# Altium PCB SGK_DVR_01.PcbDoc (part 4 of 7)
Units mil, origin at the board's own origin, x right, y up, seen from the top; angles counter-clockwise.
Board outline 3070.87 x 2598.47 mil, 6 copper layers (Top, L2 GND, l3 POWER, L4 SIG, L5 GND, Bottom), stack 58.1 mil thick; 475 components, 339 nets, 1964 pads, 1036 vias.
Unrouted connection lines stored in the file: 522.
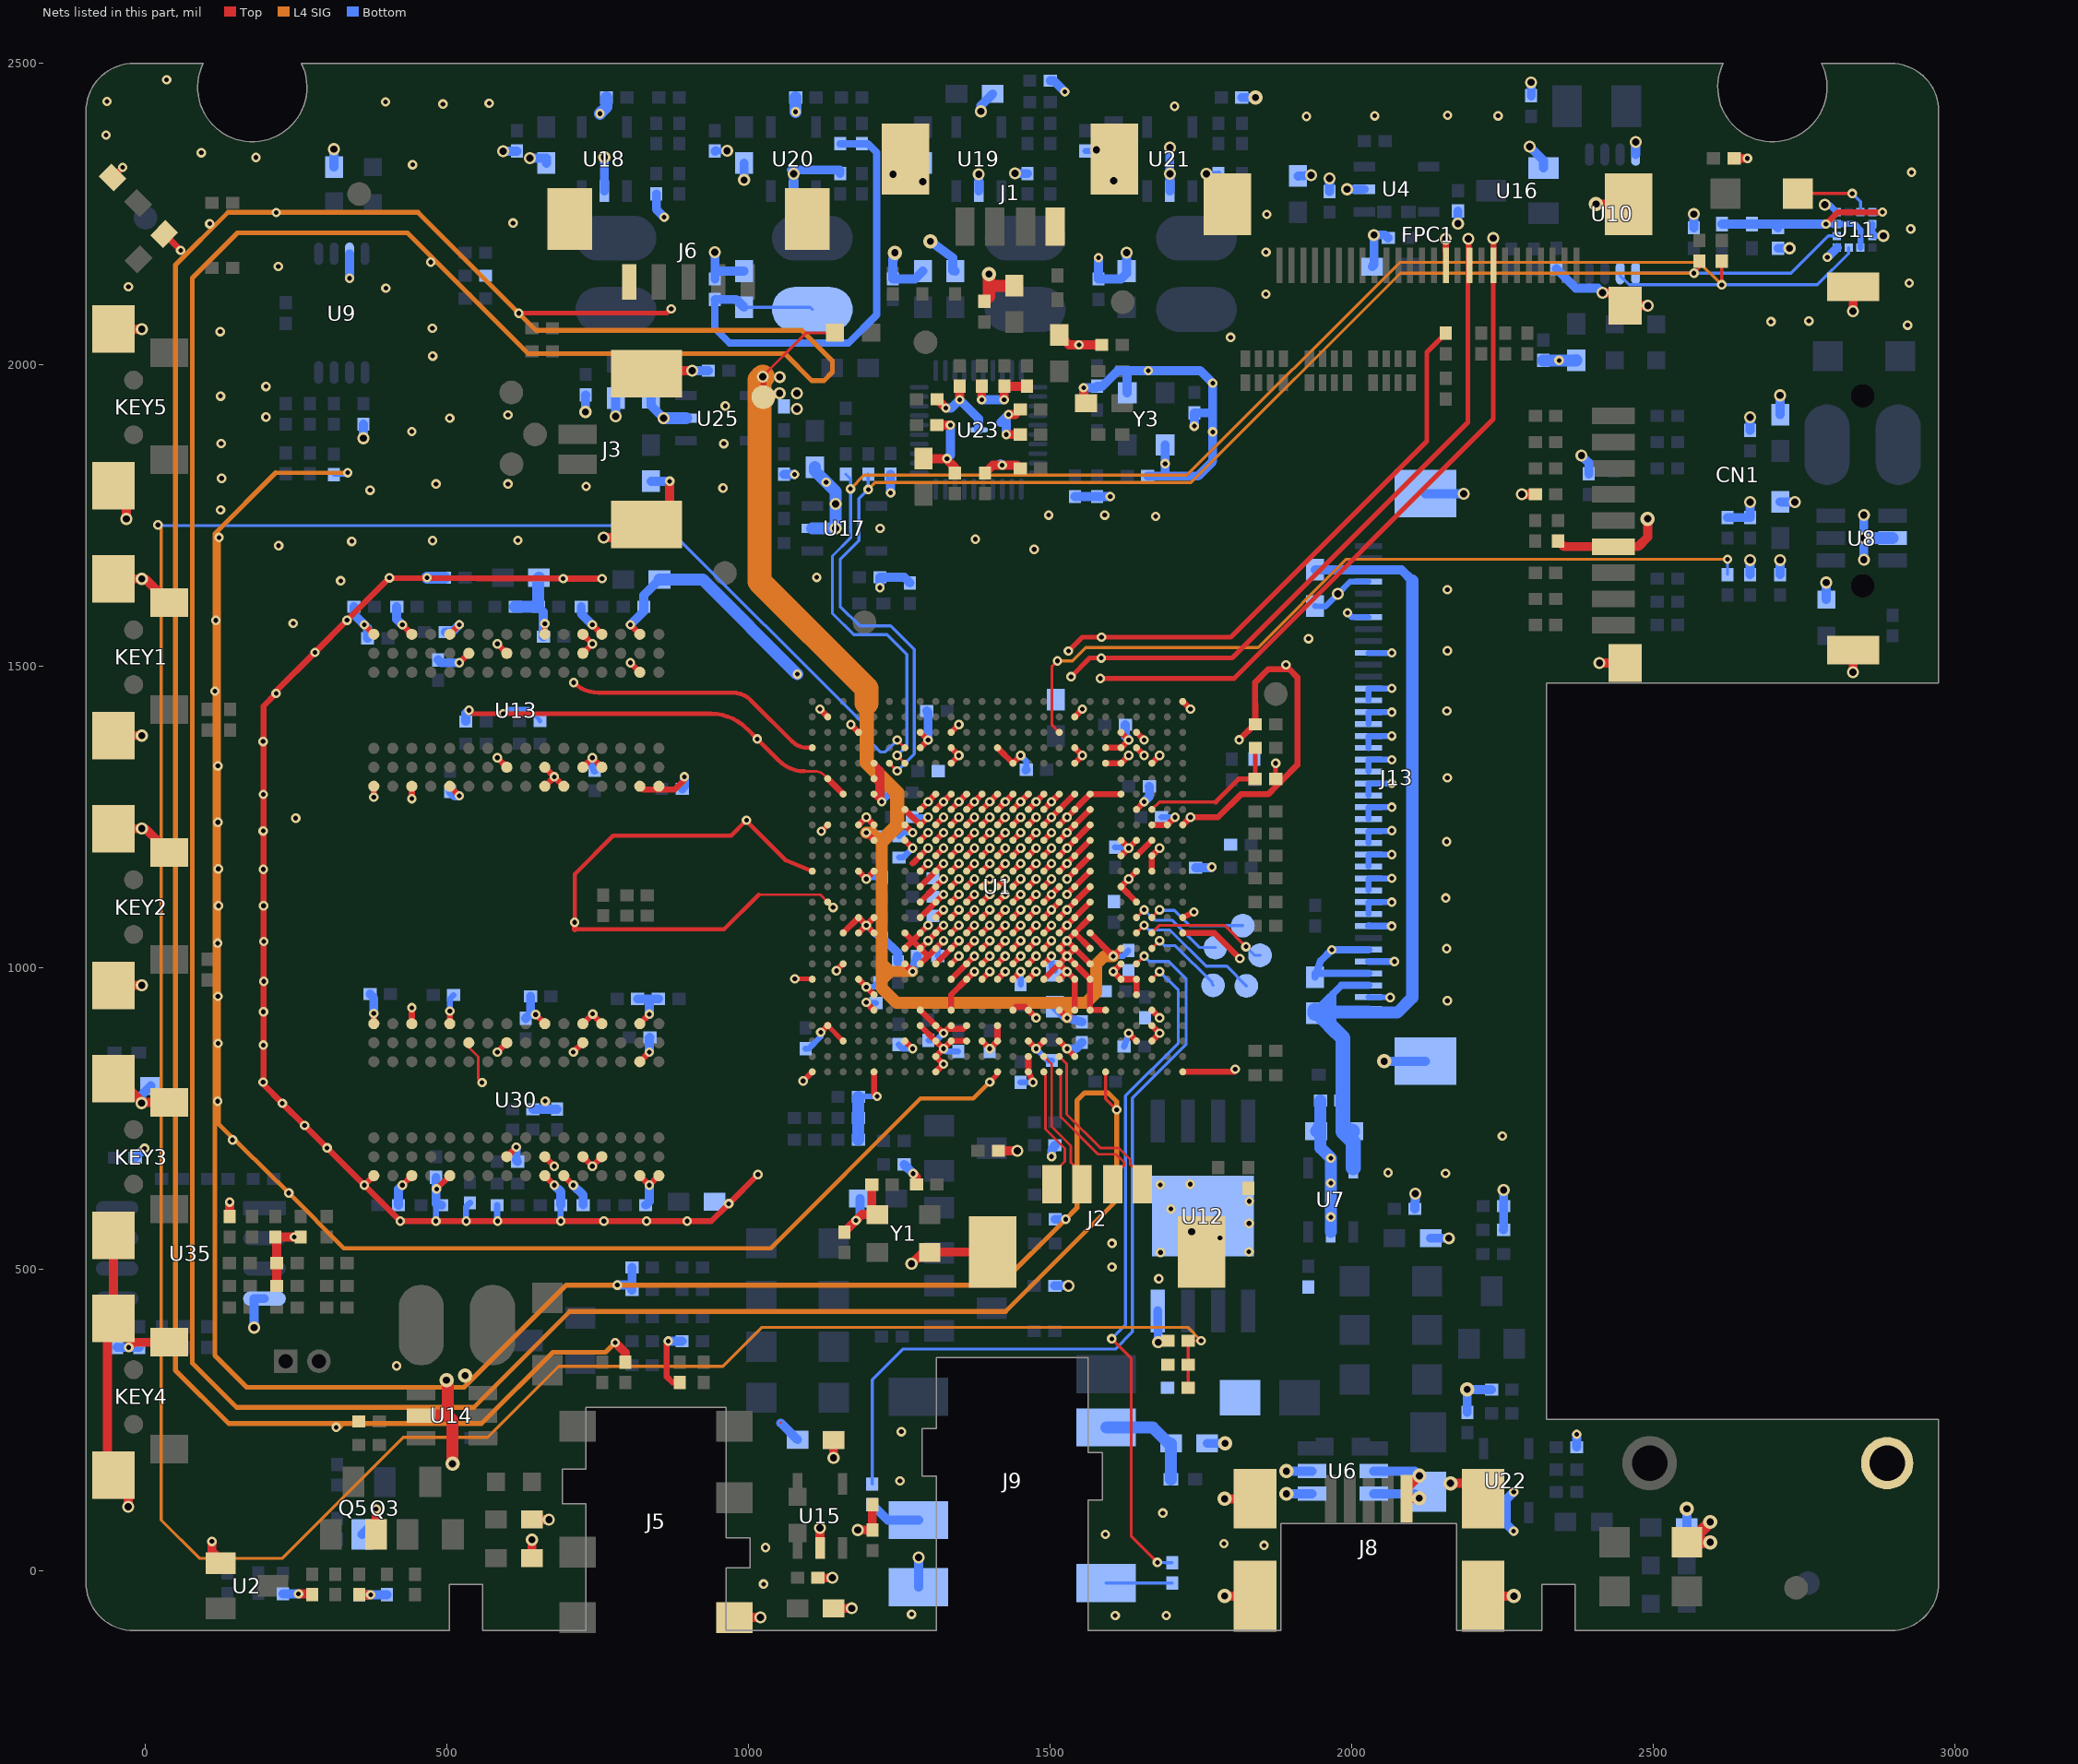
[diagram p6: the nets of this part, all layers, seen from the top]

## Via types
v1: diameter 15.75, hole 7.87, Top to Bottom, 800 vias
v2: diameter 20, hole 12, Top to Bottom, 204 vias
v3: diameter 23.62, hole 11.81, Top to Bottom, 31 vias
v4: diameter 14, hole 8, Top to Bottom, 1 vias

## Nets (pads, with @x,y where several pads share a name; then routed paths per layer and width w, separated by ;. In a path a pad name is that pad's centre, name@x,y a point inside that pad or via, vN(x,y) a via of type N, cw(c..) or ccw(c..) an arc to the next point about the centre after c; other vN are vias at no path point) (continued)
DSI_3_3V: C68.2 C70.2 C204.2 C205.2 FB7.2 J13.3 J13.38 J13.40 U7.5 | length 1659.1
  Bottom w5: C70.2@1981.83,780.09 1983.34,780.09 C70.2@1984.89,778.53
  Bottom w12: C205.2@1938.79,925.05 1938.9,925.09 1938.98,925.12 1939.87,925.44 1942.35,926.31 1953.05,930.1 1957.63,931.72 1958.66,932.08 1959.21,932.08 ; C205.2@1938.9,927.83 1939.87,928.8 1962.16,951.08 ; C205.2@1953.05,915.61 1959.21,921.77 ; 1957.63,911.04 1959.21,912.62 ; 1966.67,902 1968.42,903.76 1968.42,926.37 1968.42,930.98 ; J13.40@2027.56,932.08 1969.52,932.08 ; J13.38@2027.56,971.45 1982.33,971.45 1982.33,971.25 1968.42,957.35 ; 1959.21,912.62 1962.16,915.56 1962.16,924.72 ; 1959.21,912.62 1959.21,921.77 ; 1959.21,921.77 1962.16,924.72 ; 1959.21,921.77 1959.21,932.08 ; 1959.21,932.08 1962.16,932.08 ; 1962.16,924.72 1963.81,926.37 1968.42,930.98 ; 1962.16,924.72 1962.16,932.08 ; 1962.16,932.08 1962.16,951.08 ; 1962.16,932.08 1968.42,932.08 ; 1962.16,951.08 1968.42,957.35 ; 1968.42,930.98 1969.52,932.08 ; 1968.42,930.98 1968.42,932.08 ; 1968.42,932.08 1969.52,932.08 ; 1968.42,932.08 1968.42,957.35
  Bottom w15: C204.2@1938.98,1660.43 J13.3@2027.56,1660.43 2081.91,1660.43 2100,1642.34
  Bottom w20: 1963.81,926.37 1968.42,926.37 2075.41,926.37 2100,950.96 2100,1642.34
  Bottom w25: C205.2@1938.79,925.05 1938.9,927.83 1938.98,929.69 1939.87,928.8 1942.35,926.31 1953.05,915.61 1957.63,911.04 1966.67,902 1984.89,883.78 FB7.2@1984.89,823.25 1984.89,778.53 C68.2@1984.89,739.59 ; C68.2@2000.66,729.51 1994.89,729.59 C68.2@1984.89,739.59 ; U7.5@2002.29,668.85 2002.29,711.36 1984.89,728.76 C68.2@1984.89,739.59
DVDD_DDR: C28.2 C29.2 C32.2 C33.2 C34.2 C166.1 C167.1 C168.1 FB13.2 L11.2 R146.1 R186.1 TP3.1 U1.AA10 U1.E17 U1.G16 U1.J21 U1.W18 | length 3052.3
  Top w4.4: v2(1023.23,1980.49) 1023.23,1981.2 1095.48,2053.45 R146.1@1142.96,2053.45
  Top w10: v2(1023.23,1980.49) 1024.27,1979.46 TP3.1@1024.27,1946.67 ; v1(1194.91,1224.58) U1.AA10@1207.71,1211.78 ; U1.W18@1258.89,1007.06 v1(1271.68,994.26) ; U1.J21@1514.79,930.29 v1(1527.58,917.49) ; U1.G16@1565.97,1058.24 v1(1604.35,1019.85) U1.E17@1617.15,1032.65
  L4 SIG w18: 1220.74,979.81 1235.19,994.26 ; 1220.74,994.26 1235.19,994.26 ; 1220.74,1008.71 1235.19,994.26 ; v1(1271.68,994.26) 1235.19,994.26 ; 1514.88,942.6 1526.32,931.17 1527.58,931.17 ; v1(1527.58,917.49) 1527.58,930.42 ; 1527.58,942.6 1527.58,931.17 ; 1539.76,942.6 1527.58,930.42 ; 1527.58,930.42 1527.58,931.17
  L4 SIG w20: v1(1194.91,1224.58) 1204.29,1224.58 1220.74,1208.12 ; 1220.74,1210.75 1220.74,1208.12 ; v1(1604.35,1019.85) 1589.81,1019.85 1575.89,1005.93 1575.89,959.11 1559.39,942.6 1539.76,942.6 1527.58,942.6 1514.88,942.6 1244.81,942.6 1220.74,966.67 1220.74,979.81 1220.74,994.26 1220.74,1008.71 1220.74,1208.12
  L4 SIG w24: 1195.56,1439.16 1195.56,1340.72 1246.05,1290.23 1246.05,1236.06 1220.74,1210.75
  L4 SIG w40: v2(1023.23,1980.49) 1017.82,1975.08 1017.82,1641.19 1195.56,1463.45 1195.56,1439.16
  Bottom w5: C168.1@992.35,2095.66 1083.94,2095.66 1102.02,2095.66 L11.2@1105.5,2092.18
  Bottom w10: v1(1194.91,1224.58) 1200.95,1218.53 C28.2@1215.33,1218.53 ; v1(1604.35,1019.85) 1620.55,1019.85 1629.41,1028.72 C34.2@1629.41,1029.34
  Bottom w12: C167.1@944.06,2108.6 944.06,2060.58 968.49,2036.15 1087.59,2036.15 1165.09,2036.15 1212.04,2083.11 1212.04,2352.34 1197.64,2366.74 R186.1@1187.72,2366.74 C166.1@1151.42,2366.74
  Bottom w15: C167.1@944.06,2108.6 979.41,2108.6 C168.1@992.35,2095.66 ; v1(1271.68,994.26) 1271.42,994.51 C29.2@1279.51,1020.05 ; C32.2@1507.4,935.8 1525.72,917.49 v1(1527.58,917.49) C33.2@1552.55,910.73
  other v2: 1079.98,1927 1051.24,1953.2 1079.98,1953.1 1051.29,1980.1
E_RXN: J2.1 U1.K25 | length 209.5
  Top w4.2: U1.K25@1489.2,827.92 1491.85,825.27 1491.85,733.14 1523.94,701.05 1523.94,679.7 1502.83,658.6 J2.1@1502.83,641.56
E_RXP: J2.2 U1.K24 | length 238
  Top w4.2: U1.K24@1489.2,853.51 1502.05,840.66 1502.05,737.36 1534.14,705.27 1534.14,677.72 1552.05,659.82 J2.2@1552.05,641.56
E_TXN: J2.4 U1.J24 | length 286.6
  Top w4.2: U1.J24@1514.79,853.51 1527.18,841.12 1527.18,757.65 1583.22,701.61 1613.36,701.61 1632.59,682.38 1632.59,674.52 1652.44,654.66 J2.4@1652.44,641.56
E_TXP: J2.3 U1.J25 | length 256.5
  Top w4.2: U1.J25@1514.79,827.92 1516.98,825.73 1516.98,753.42 1579,691.4 1609.13,691.4 1622.38,678.16 1622.38,673.01 1603.23,653.85 J2.3@1603.23,641.56
G_SEN_SCK: R8.1 R33.2 U1.W5 U10.6 U11.12 | length 2665.1
  Top w4.2: v1(1246.09,1352.53) U1.W5@1258.89,1339.73
  Top w5: v1(2612.86,2132.89) 2612.86,2166.81 2612.98,2166.92 R8.1@2612.98,2172.29
  L4 SIG w5: v1(1168.75,1794.56) 1191.35,1817.17 1726.37,1817.17 2079.33,2170.13 2575.63,2170.13 v1(2612.86,2132.89)
  Bottom w5: R33.2@1160.91,1818.72 1168.75,1810.89 v1(1168.75,1794.56) 1168.75,1713.25 1138.74,1683.24 1138.74,1588.11 1173.94,1552.91 1229.24,1552.91 1262.3,1519.86 1262.3,1368.74 v1(1246.09,1352.53) ; U10.6@2444.6,2152.14 2444.7,2152.04 2444.7,2147.91 2459.72,2132.89 2574.27,2132.89 v1(2612.86,2132.89) 2771.51,2132.89 2823.29,2184.67 U11.12@2823.29,2194.38
G_SEN_SDA: R9.1 R34.2 U1.Y5 U10.5 U11.2 | length 2522.1
  Top w5: U1.Y5@1233.3,1339.73 v1(1246.09,1326.94) ; v1(2566.95,2152.14) 2575.9,2161.09 2575.9,2172.08 R9.1@2575.7,2172.29
  L4 SIG w5: v1(1198.12,1793.52) 1209.56,1804.96 1733.34,1804.96 2080.51,2152.14 v1(2566.95,2152.14)
  Bottom w5: R34.2@1198.12,1818.72 v1(1198.12,1793.52) 1182.78,1778.18 1182.78,1708.89 1151.64,1677.75 1151.64,1599.65 1183.96,1567.33 1235.23,1567.33 1274.33,1528.24 1274.33,1355.18 v1(1246.09,1326.94) ; U10.5@2470.19,2152.14 v1(2566.95,2152.14) 2727.95,2152.14 2789.88,2214.07 U11.2@2803.6,2214.07
GENSOR_V33: C120.1 FB10.2 FB11.2 U11.3 U11.7 U11.11 | length 404
  Top w10: v1(2785.68,2233.49) 2805.63,2253.44 v1(2879.39,2253.44)
  Bottom w10: v1(2785.68,2233.49) 2803.6,2233.49 2816.4,2233.49 2816.67,2233.75 ; U11.3@2803.6,2233.75 2816.67,2233.75 ; U11.11@2842.97,2194.38 2842.97,2224.22 2833.45,2233.75 2816.67,2233.75 ; U11.7@2862.66,2253.44 v1(2879.39,2253.44)
  Bottom w15: FB11.2@2613.12,2233.49 FB10.2@2662.98,2233.49 C120.1@2700.19,2233.49 ; C120.1@2706.19,2227.49 C120.1@2700.19,2233.49 ; v1(2785.68,2233.49) 2706.19,2233.49 C120.1@2700.19,2233.49
GND: C1.1 C2.1 C3.1 C4.1 C5.1 C6.1 C7.1 C8.1 C9.1 C10.1 C11.1 C12.1 C13.1 C14.1 C15.1 C16.1 C17.1 C18.1 C19.1 C20.1 C21.1 C22.1 C23.1 C24.1 C25.1 C26.1 C27.1 C28.1 C29.1 C30.1 C31.1 C32.1 C33.1 C34.1 C35.2 C36.2 C39.2 C41.2 C42.2 C43.1 C44.1 C45.1 C46.1 C47.1 C48.1 C49.2 C50.1 C51.2 C53.1 C54.1 C56.1 C57.1 C58.1 C60.2 C61.1 C62.1 C63.1 C64.1 C65.1 C66.1 C67.2 C68.1 C69.2 C70.1 C71.1 C72.1 C73.1 C74.2 C76.1 C77.1 C78.1 C79.1 C80.1 C81.1 C82.1 C88.1 C89.1 C90.1 C91.1 C93.1 C94.1 C95.1 C96.1 C97.2 C98.1 C99.2 C100.1 C101.2 C107.1 C108.1 C109.1 C110.1 C111.1 C114.1 C115.2 C116.1 C117.2 C118.1 C119.1 C120.2 C121.2 C122.1 C123.1 C124.1 C125.1 C126.1 C129.2 C130.1 C132.1 C133.1 C134.1 C136.1 C137.1 C138.1 C139.1 C141.1 C142.1 C143.1 C144.1 C145.1 C146.1 C147.1 C148.1 C149.1 C150.1 C151.1 C152.1 C153.1 C156.2 C157.2 C158.2 C159.2 C160.1 C162.2 C163.2 C164.2 C165.2 C167.2 C168.2 C170.2 C171.2 C172.2 C173.2 C174.2 C175.2 C176.1 C177.1 C178.1 C179.1 C180.1 C181.1 C182.1 C183.1 C184.1 C185.1 C186.1 C194.2 C195.2 C196.1 C197.1 C198.1 C199.1 C200.1 C201.1 C202.1 C204.1 C205.1 C271.1 C272.1 C273.1 C274.1 C275.1 C276.1 C278.1 C282.1 C284.1 C285.1 CN1.6 CN1.10 CN1.11 CN1.12 CN1.13 D9.1 FPC1.8 FPC1.10 FPC1.12 FPC1.27 FPC1.28 J1.1 J1.5 J1.6 J2.5 J2.6 J3.3 J3.4 J5.1 J6.5 J6.6 J6.7 J7.2 J8.5 J8.6 J8.7 J8.8 J8.9 J9.1 J13.4 J13.7 J13.10 J13.13 J13.14 J13.15 J13.16 J13.17 J13.18 J13.19 J13.20 J13.21 J13.22 J13.23 J13.24 J13.25 J13.26 J13.27 J13.28 J13.29 J13.30 J13.31 J13.32 J13.33 J13.35 J13.36 J13.37 J13.39 J13.41 J13.42 KEY1.2 KEY1.3 KEY1.4 KEY2.2 KEY2.3 KEY2.4 KEY3.2 KEY3.3 KEY3.4 KEY4.2 KEY4.3 KEY4.4 KEY5.3 KEY5.4 LED1.2 LED3.2 Q3.2 Q5.2 R1.2 R2.2 R5.2 R12.1 R29.2 R45.1 R47.1 R52.2 R54.1 R55.1 R58.1 R59.1 R62.1 R63.2 R84.1 R88.1 R92.1 R93.2 R94.2 R96.2 R98.2 R99.2 R102.2 R112.1 R114.2 R115.1 R118.1 R121.1 R133.2 R143.2 R144.2 R145.2 R148.2 R150.2 R154.1 R156.1 R165.2 R166.2 R173.2 R174.2 R177.2 R185.1 R191.2 R195.2 R196.1 R199.1 R288.1 U1.A1 U1.A9 U1.A15 U1.A16 U1.A25 U1.AA5 U1.AA6 U1.AA7 U1.AA9 U1.AA12 U1.AA15 U1.AA16 U1.AA20 U1.AA21 U1.AA25 U1.AB3 U1.AB9 U1.AB12 U1.AB15 U1.AB16 U1.AB19 U1.AC7 U1.AC16 U1.AC18 U1.AC23 U1.AD2 U1.AD6 U1.AD9 U1.AD14 U1.AD22 U1.AE4 U1.AE12 U1.AE19 U1.AE25 U1.B9 U1.C5 U1.C9 U1.C10 U1.C11 U1.C12 U1.C21 U1.C22 U1.C23 U1.D3 U1.D4 U1.D8 U1.D10 U1.D11 U1.D12 U1.D14 U1.D19 U1.D20 U1.D23 U1.E3 U1.E4 U1.E5 U1.E7 U1.E10 U1.E11 U1.E13 U1.E18 U1.E19 U1.F4 U1.F5 U1.F21 U1.F25 U1.G7 U1.G8 U1.G9 U1.G10 U1.G11 U1.G12 U1.G13 U1.G14 U1.G15 U1.G17 U1.G18 U1.G19 U1.G21 U1.H2 U1.H4 U1.H5 U1.H7 U1.H8 U1.H9 U1.H10 U1.H11 U1.H12 U1.H13 U1.H14 U1.H15 U1.H16 U1.H17 U1.H18 U1.H19 U1.H21 U1.H24 U1.J7 U1.J8 U1.J9 U1.J10 U1.J11 U1.J12 U1.J13 U1.J14 U1.J15 U1.J16 U1.J17 U1.J18 U1.J19 U1.J23 U1.K7 U1.K8 U1.K9 U1.K10 U1.K11 U1.K12 U1.K13 U1.K14 U1.K15 U1.K16 U1.K17 U1.K18 U1.K19 U1.K23 U1.L7 U1.L8 U1.L9 U1.L10 U1.L11 U1.L12 U1.L13 U1.L14 U1.L15 U1.L16 U1.L17 U1.L18 U1.L19 U1.L21 U1.L23 U1.L24 U1.L25 U1.M5 U1.M7 U1.M8 U1.M9 U1.M10 U1.M11 U1.M12 U1.M13 U1.M14 U1.M15 U1.M16 U1.M17 U1.M18 U1.M19 U1.M21 U1.N4 U1.N7 U1.N8 U1.N9 U1.N10 U1.N11 U1.N12 U1.N13 U1.N14 U1.N15 U1.N16 U1.N17 U1.N18 U1.N19 U1.N22 U1.N23 U1.N25 U1.P7 U1.P8 U1.P9 U1.P10 U1.P11 U1.P12 U1.P13 U1.P14 U1.P15 U1.P16 U1.P17 U1.P18 U1.P19 U1.P23 U1.R7 U1.R8 U1.R9 U1.R10 U1.R11 U1.R12 U1.R13 U1.R14 U1.R15 U1.R16 U1.R17 U1.R18 U1.R19 U1.R22 U1.R23 U1.T3 U1.T4 U1.T5 U1.T7 U1.T8 U1.T9 U1.T10 U1.T11 U1.T12 U1.T13 U1.T14 U1.T15 U1.T16 U1.T17 U1.T18 U1.T19 U1.T21 U1.T22 U1.T23 U1.U7 U1.U8 U1.U9 U1.U10 U1.U11 U1.U12 U1.U13 U1.U14 U1.U15 U1.U16 U1.U17 U1.U18 U1.U22 U1.U23 U1.U24 U1.U25 U1.V3 U1.V4 U1.V8 U1.V9 U1.V10 U1.V11 U1.V12 U1.V13 U1.V14 U1.V15 U1.V16 U1.V17 U1.V18 U1.V21 U1.V22 U1.W8 U1.W9 U1.W10 U1.W16 U1.W17 U1.W23 U2.1 U4.2 U6.1 U6.2 U6.5 U6.6 U7.2 U8.2 U9.7 U10.4 U11.1 U11.4 U11.8 U11.9 U12.4 U12.9 U13.A9 U13.B1 U13.B3 U13.B9 U13.D1 U13.D8 U13.E1 U13.E2 U13.E8 U13.F9 U13.G1 U13.G8 U13.G9 U13.J2 U13.J8 U13.L2 U13.M1 U13.M9 U13.P1 U13.P9 U13.T1 U13.T9 U14.2 U15.2 U16.1 U17.2 U18.2 U19.2 U20.2 U21.2 U22.2 U23.41 U25.2 U30.A9 U30.B1 U30.B3 U30.B9 U30.D1 U30.D8 U30.E1 U30.E2 U30.E8 U30.F9 U30.G1 U30.G8 U30.G9 U30.J2 U30.J8 U30.L2 U30.M1 U30.M9 U30.P1 U30.P9 U30.T1 U30.T9 U35.4 Y1.2 Y1.4 Y3.2 Y3.4 | length 43028.8
  Top w4.2: U30.L2@536.04,876.27 536.04,868.56 551.78,852.82 551.78,816.41 v1(557.96,810.23) ; 1016.56,1121.77 1118.57,1121.77 U1.AD14@1130.93,1109.42 v1(1139.9,1100.45) ; 1092.48,1326.36 1109.67,1326.36 ; U1.AD6@1130.93,1314.14 1125.1,1319.97 ; 1109.67,1326.36 cw(c1109.67,1304.55) 1125.1,1319.97 ; 1109.67,1326.36 cw(c1109.67,1304.55) 1125.1,1319.97
  Top w5: U1.F25@1591.56,827.92 1591.56,783.37 v1(1609.95,764.98)
  Top w7: v1(536.26,1427.53) 542.02,1421.76 v1(593.38,1421.76) 937.43,1421.76 ; v1(709.9,1473.44) ccw(c750.56,1514.1) 750.56,1456.59 973.92,1456.59 cw(c973.92,1415.13) 975.12,1456.58 cw(c973.92,1415.16) 980.23,1456.11 cw(c973.92,1415.16) 1003.22,1444.46 1071.83,1375.84 ccw(c1097.23,1401.24) 1097.23,1365.32 U1.AE4@1105.34,1365.33 ; 711.52,1064.3 959.08,1064.3 1016.56,1121.77 ; v1(711.52,1075.88) 711.52,1155.8 775.34,1219.62 970.77,1219.62 v1(996.33,1245.19) 996.33,1244.19 1061.94,1178.58 U1.AE12@1105.34,1160.6 ; 937.43,1421.76 cw(c937.43,1337.97) 996.68,1397.22 ; 937.43,1421.76 cw(c937.43,1337.97) 996.68,1397.22 ; 996.68,1397.22 v1(1014,1379.89) 1049.89,1344 ; 1049.89,1344 ccw(c1092.48,1386.59) 1092.48,1326.36 cw(c1092.48,1386.59) 1049.89,1344
  Top w8: v1(619.03,2085.74) 864.48,2085.94 v1(871.55,2093.01) ; v1(1076.37,982.1) 1105.34,982.1 U1.AE19@1105.34,981.47 ; v1(1120.49,1226.93) U1.AD9@1130.93,1237.37 ; U1.AD22@1130.93,904.69 U1.AC23@1156.52,879.1 ; v1(1399.68,811.1) 1412.43,823.85 U1.N25@1412.43,827.92 ; v1(1529.93,1525.66) 1552.91,1548.64 v1(1584.82,1548.64) 1799.29,1548.64 2124.08,1873.42 2124.08,2021.26 C61.1@2155.51,2052.7 ; v1(1534.32,1483.14) 1565.3,1514.11 v1(1584.38,1514.11) 1801.28,1514.11 2192.31,1905.14 2192.31,2162.78 FPC1.10@2193.08,2165.09 ; v1(1582.97,1480.34) 1804.44,1480.34 2234.25,1910.16 FPC1.8@2234.25,2165.35 ; C74.2@1873.56,1313.61 v1(1873.56,1339.65)
  Top w10: LED3.2@-54.53,2310.96 v1(-37.79,2327.7) ; LED1.2@31.1,2217.36 v1(58.4,2189.97) v1(58.4,2189.97) ; v1(362.81,1569.18) U13.T1@378.56,1553.44 ; U30.T9@378.56,655.8 v1@362.82,640.06 ; U30.T1@378.56,907.77 v1(378.56,924.88) ; v1(378.56,1283.45) U13.T9@378.56,1301.47 ; v1(425.81,640.05) U30.P9@441.55,655.8 ; v1(425.81,1569.18) U13.P1@441.55,1553.44 ; U30.P1@441.55,907.77 v1(441.55,934.21) ; v1(441.55,1280.92) U13.P9@441.55,1301.47 ; v1(482.59,633.84) U30.M9@504.55,655.8 ; U30.M1@504.55,907.77 v1(504.55,928.61) ; U13.M9@504.55,1301.47 v1(520.29,1285.72) ; U13.M1@504.55,1553.44 v1(520.29,1569.18) ; v1(520.29,1506.19) U13.L2@536.04,1521.94 ; v1(583.29,860.52) U30.J2@599.03,876.27 ; v1(583.29,1348.71) U13.J8@599.03,1332.96 ; v1(583.29,1537.69) U13.J2@599.03,1521.94 ; U30.J8@599.03,687.29 v1(614.78,703.04) ; v1(646.91,922.89) U30.G1@662.03,907.77 ; U30.G9@662.03,655.8 v1(677.77,640.05) ; U30.G8@662.03,687.29 v1(677.77,671.55) ; U13.G9@662.03,1301.47 v1(677.77,1317.22) ; U13.G8@662.03,1332.96 v1(677.77,1317.22) ; U13.G1@662.03,1553.44 U13.G1@662.03,1553.44 v1(662.09,1571.1) ; U30.F9@693.52,655.8 v1(709.27,640.05) ; U13.F9@693.52,1301.47 v1(677.77,1317.22) ; v1(709.27,860.52) U30.E2@725.02,876.27 ; 711.52,1064.3 v1(711.52,1075.88) ; U30.E8@725.02,687.29 v1(740.77,671.55) U30.D8@756.51,687.29 ; U30.E1@725.02,907.77 v1(741.39,923.85) 741.39,922.89 U30.D1@756.51,907.77 ; U13.E8@725.02,1332.96 v1(740.77,1348.71) U13.D8@756.51,1332.96 ; U13.E2@725.02,1521.94 v1(740.77,1537.69) U13.E1@725.02,1553.44 ; v1(740.77,1569.18) U13.D1@756.51,1553.44 ; v1(756.98,1645.75) v1(692.56,1645.75) v1(404.45,1647.1) v1(334.15,1576.79) v1(280.92,1523.56) 216.6,1459.24 v1(216.6,1455.45) 195.62,1434.47 195.62,1103.39 195.62,807.13 v1(226.91,775.84) v1(263.75,739.11) v1(301.15,701.82) 301.15,701.73 v1@362.82,640.06 ; v1(803.76,1506.19) U13.B3@819.51,1490.44 ; v1(803.76,1569.18) U13.B1@819.51,1553.44 ; U30.B9@819.51,655.8 v1(835.25,640.05) U30.A9@851,655.8 ; U30.B3@819.51,844.78 v1(835.25,860.52) ; U30.B1@819.51,907.77 v1(835.25,923.52) ; U13.B9@819.51,1301.47 824.96,1296.01 U13.A9@856.46,1296.01 ; U13.A9@851,1301.47 U13.A9@856.46,1296.01 ; v1(866.67,381.58) 864.26,379.17 864.26,322.34 873.83,312.78 R88.1@886,312.78 ; v1(893.36,1317.21) 893.36,1312.24 877.13,1296.01 U13.A9@856.46,1296.01 ; v1(1015.31,657.71) v1(966.96,609.36) 938.09,580.49 v1(898,580.49) v1(830.67,580.49) v1(759.94,580.49) v1(688.34,580.49) v1(583.72,580.49) v1(531.72,580.49) v1(481.57,580.49) v1(422.39,580.49) v1@362.82,640.06 ; v1(1090.19,812.79) U1.AE25@1105.34,827.92 ; v1(1118.13,1429.3) U1.AD2@1130.93,1416.51 ; v1@1119.53,893.44 U1.AD22@1130.86,904.77 ; U1.AD6@1130.93,1314.14 U1.AC7@1156.52,1288.55 ; v1(1145.41,995.48) 1145.41,995.94 U1.AC18@1156.52,1007.06 ; U1.AC16@1156.52,1058.24 U1.AB15@1182.11,1083.83 v1(1194.91,1071.03) ; v1(1169.31,1403.71) U1.AB3@1182.11,1390.92 ; U1.AB19@1182.11,981.47 v1(1194.91,968.67) U1.AA20@1207.71,955.88 ; U1.AB16@1182.11,1058.24 v1(1194.91,1071.03) ; U1.AB12@1182.11,1160.6 v1(1194.91,1147.8) U1.AA12@1207.71,1160.6 ; U1.AB9@1182.11,1237.37 v1(1194.91,1250.17) U1.AA9@1207.71,1237.37 ; v1(1194.91,943.08) U1.AA21@1207.71,930.29 ; U1.AA25@1207.71,827.92 1207.7,790.82 v1(1212.96,787.39) ; U1.AA16@1207.71,1058.24 v1(1194.91,1071.03) ; U1.AA15@1207.71,1083.83 v1(1194.91,1071.03) ; U1.AA7@1207.71,1288.55 1214.71,1281.55 1214.8,1281.45 ; U1.AA6@1207.71,1314.14 1214.9,1306.95 ; U1.AA5@1207.71,1339.73 1214.9,1332.54 ; U1.W23@1258.89,879.1 v1(1271.68,866.31) ; U1.W17@1258.89,1032.65 1271.68,1045.44 ; U1.W16@1258.89,1058.24 1271.68,1045.44 ; U1.W10@1258.89,1211.78 v1(1271.68,1198.99) ; U1.W9@1258.89,1237.37 v1(1271.68,1224.58) ; U1.W8@1258.89,1262.96 U1.V9@1284.48,1237.37 v1(1297.27,1250.17) ; 1271.68,1173.39 U1.V11@1284.48,1186.19 v1(1297.27,1198.99) ; U1.V22@1284.48,904.69 U1.U23@1310.07,879.1 v1(1322.86,866.31) ; U1.V21@1284.48,930.29 U1.U22@1310.07,904.69 v1(1322.86,891.9) 1329.9,898.94 ; U1.V18@1284.48,1007.06 1297.27,1019.85 ; U1.V15@1284.48,1083.83 U1.U14@1310.07,1109.42 v1(1322.86,1122.21) ; U1.V14@1284.48,1109.42 U1.U13@1310.07,1135.01 v1(1322.86,1147.8) ; U1.V13@1284.48,1135.01 U1.U12@1310.07,1160.6 v1(1322.86,1173.39) ; U1.V12@1284.48,1160.6 v1(1297.27,1173.39) ; U1.V10@1284.48,1211.78 v1(1297.27,1224.58) ; U1.V8@1284.48,1262.96 v1(1297.27,1275.76) U1.U7@1310.07,1288.55 ; U1.V4@1284.48,1365.33 v1(1297.27,1378.12) U1.V3@1284.48,1390.92 ; v1(1297.27,1071.03) U1.V16@1284.48,1058.24 1271.68,1045.44 ; U1.U25@1310.07,827.92 v1(1322.86,840.72) U1.U24@1310.07,853.51 v1(1322.86,866.31) ; U1.U18@1310.07,1007.06 U1.T17@1335.66,1032.65 v1(1348.45,1045.44) ; U1.U15@1310.07,1083.83 v1(1322.86,1096.62) ; U1.U11@1310.07,1186.19 v1(1322.86,1198.99) ; U1.U10@1310.07,1211.78 v1(1322.86,1224.58) ; U1.U9@1310.07,1237.37 v1(1322.86,1250.17) ; U1.U8@1310.07,1262.96 v1(1322.86,1275.76) U1.T7@1335.66,1288.55 ; v1(1322.86,1045.44) U1.U17@1310.07,1032.65 1297.27,1019.85 ; v1(1322.86,1071.03) U1.U16@1310.07,1058.24 v1(1297.27,1045.44) U1.V17@1284.48,1032.65 ; U1.T22@1335.66,904.69 1329.9,898.94 ; U1.T21@1335.66,930.29 1335.65,955.88 U1.R19@1361.25,981.47 v1(1374.04,994.26) ; U1.T19@1335.66,981.47 U1.R18@1361.25,1007.06 v1(1374.04,1019.85) ; U1.T18@1335.66,1007.06 v1(1348.45,1019.85) ; U1.T16@1335.66,1058.24 v1(1348.45,1071.03) ; U1.T15@1335.66,1083.83 v1(1348.45,1096.62) ; U1.T14@1335.66,1109.42 v1(1348.45,1122.21) ; U1.T13@1335.66,1135.01 v1(1348.45,1147.8) ; U1.T12@1335.66,1160.6 v1(1348.45,1173.39) ; U1.T11@1335.66,1186.19 v1(1348.45,1198.99) ; U1.T10@1335.66,1211.78 v1(1348.45,1224.58) ; U1.T9@1335.66,1237.37 v1(1348.45,1250.17) ; U1.T8@1335.66,1262.96 v1(1348.45,1275.76) U1.R7@1361.25,1288.55 ; U1.T5@1335.66,1339.73 v1(1348.45,1352.53) U1.T4@1335.66,1365.33 ; U1.T3@1335.66,1390.92 v1(1348.45,1403.71) ; U1.R23@1361.25,879.1 U1.T23@1335.66,879.1 v1(1322.86,866.31) ; U1.R22@1361.25,904.69 1355.49,898.94 1329.9,898.94 ; U1.R17@1361.25,1032.65 v1(1374.04,1045.44) ; U1.R16@1361.25,1058.24 v1(1374.04,1071.03) ; U1.R15@1361.25,1083.83 v1(1374.04,1096.62) ; U1.R14@1361.25,1109.42 v1(1374.04,1122.21) ; U1.R13@1361.25,1135.01 v1(1374.04,1147.8) ; U1.R12@1361.25,1160.6 v1(1374.04,1173.39) ; U1.R11@1361.25,1186.19 v1(1374.04,1198.99) ; U1.R10@1361.25,1211.78 v1(1374.04,1224.58) ; U1.R9@1361.25,1237.37 v1(1374.04,1250.17) ; U1.R8@1361.25,1262.96 v1(1374.04,1275.76) U1.P7@1386.84,1288.55 ; U1.P23@1386.84,879.1 v1(1399.63,866.31) U1.N23@1412.43,879.1 U1.N22@1412.43,904.69 ; U1.P19@1386.84,981.47 v1(1399.63,994.26) ; U1.P18@1386.84,1007.06 v1(1399.63,1019.85) ; U1.P17@1386.84,1032.65 v1(1399.63,1045.44) ; U1.P16@1386.84,1058.24 v1(1399.63,1071.03) ; U1.P15@1386.84,1083.83 v1(1399.63,1096.62) ; U1.P14@1386.84,1109.42 v1(1399.63,1122.21) ; U1.P13@1386.84,1135.01 v1(1399.63,1147.8) ; U1.P12@1386.84,1160.6 v1(1399.63,1173.39) ; U1.P11@1386.84,1186.19 v1(1399.63,1198.99) ; U1.P10@1386.84,1211.78 v1(1399.63,1224.58) ; U1.P9@1386.84,1237.37 v1(1399.63,1250.17) ; U1.P8@1386.84,1262.96 v1(1399.63,1275.76) U1.N7@1412.43,1288.55 ; U1.N19@1412.43,981.47 v1(1425.22,994.26) ; U1.N18@1412.43,1007.06 v1(1425.22,1019.85) ; U1.N17@1412.43,1032.65 v1(1425.22,1045.44) ; U1.N16@1412.43,1058.24 v1(1425.22,1071.03) ; U1.N15@1412.43,1083.83 v1(1425.22,1096.62) ; U1.N14@1412.43,1109.42 v1(1425.22,1122.21) ; U1.N13@1412.43,1135.01 v1(1425.22,1147.8) ; U1.N12@1412.43,1160.6 v1(1425.22,1173.39) ; U1.N11@1412.43,1186.19 v1(1425.22,1198.99) ; U1.N10@1412.43,1211.78 v1(1425.22,1224.58) ; U1.N9@1412.43,1237.37 v1(1425.22,1250.17) ; U1.N8@1412.43,1262.96 v1(1425.22,1275.76) U1.M7@1438.02,1288.55 ; U1.N4@1412.43,1365.33 U1.M5@1438.02,1339.73 v1(1450.81,1352.53) ; U1.M21@1438.02,930.29 1443.71,935.98 1457.91,935.98 U1.L21@1463.61,930.29 v1(1476.4,917.49) ; U1.M19@1438.02,981.47 v1(1450.81,994.26) ; U1.M18@1438.02,1007.06 v1(1450.81,1019.85) ; U1.M17@1438.02,1032.65 v1(1450.81,1045.44) ; U1.M16@1438.02,1058.24 v1(1450.81,1071.03) ; U1.M15@1438.02,1083.83 v1(1450.81,1096.62) ; U1.M14@1438.02,1109.42 v1(1450.81,1122.21) ; U1.M13@1438.02,1135.01 v1(1450.81,1147.8) ; U1.M12@1438.02,1160.6 v1(1450.81,1173.39) ; U1.M11@1438.02,1186.19 v1(1450.81,1198.99) ; U1.M10@1438.02,1211.78 v1(1450.81,1224.58) ; U1.M9@1438.02,1237.37 v1(1450.81,1250.17) ; U1.M8@1438.02,1262.96 v1(1450.81,1275.76) U1.L7@1463.61,1288.55 ; U1.L24@1463.61,853.51 U1.L25@1463.61,827.92 v1(1471.39,810.7) ; U1.L23@1463.61,879.1 v1(1476.4,866.31) U1.K23@1489.2,879.1 ; U1.L19@1463.61,981.47 v1(1476.4,994.26) ; U1.L18@1463.61,1007.06 v1(1476.4,1019.85) ; U1.L17@1463.61,1032.65 v1(1476.4,1045.44) ; U1.L16@1463.61,1058.24 v1(1476.4,1071.03) ; U1.L15@1463.61,1083.83 v1(1476.4,1096.62) ; U1.L14@1463.61,1109.42 v1(1476.4,1122.21) ; U1.L13@1463.61,1135.01 v1(1476.4,1147.8) ; U1.L12@1463.61,1160.6 v1(1476.4,1173.39) ; U1.L11@1463.61,1186.19 v1(1476.4,1198.99) ; U1.L10@1463.61,1211.78 v1(1476.4,1224.58) ; U1.L9@1463.61,1237.37 v1(1476.4,1250.17) ; U1.L8@1463.61,1262.96 v1(1476.4,1275.76) U1.K7@1489.2,1288.55 ; U1.K19@1489.2,981.47 U1.J18@1514.79,1007.06 ; U1.K18@1489.2,1007.06 v1(1501.99,1019.85) ; U1.K17@1489.2,1032.65 v1(1501.99,1045.44) ; U1.K16@1489.2,1058.24 v1(1501.99,1071.03) ; U1.K15@1489.2,1083.83 v1(1501.99,1096.62) U1.J14@1514.79,1109.42 ; U1.K14@1489.2,1109.42 v1(1501.99,1122.21) U1.J13@1514.79,1135.01 ; U1.K13@1489.2,1135.01 v1(1501.99,1147.8) ; U1.K12@1489.2,1160.6 v1(1501.99,1173.39) ; U1.K11@1489.2,1186.19 v1(1501.99,1198.99) ; U1.K10@1489.2,1211.78 v1(1501.99,1224.58) ; U1.K9@1489.2,1237.37 v1(1501.99,1250.17) 1527.58,1275.76 ; U1.K8@1489.2,1262.96 v1(1501.99,1275.76) U1.J7@1514.79,1288.55 ; U1.J23@1514.79,879.1 v1(1527.58,866.31) U1.H24@1540.38,853.51 ; U1.J19@1514.79,981.47 v1(1527.58,994.26) ; U1.J16@1514.79,1058.24 v1(1527.58,1071.03) 1545.25,1088.7 ; U1.J15@1514.79,1083.83 v1(1527.58,1096.62) 1547.13,1116.17 ; U1.J12@1514.79,1160.6 v1(1527.58,1173.39) 1545.91,1191.72 ; U1.J11@1514.79,1186.19 v1(1527.58,1198.99) 1547.54,1218.94 ; U1.J10@1514.79,1211.78 v1(1527.58,1224.58) 1553.17,1250.17 ; U1.J9@1514.79,1237.37 v1(1527.58,1250.17) U1.H8@1540.38,1262.96 1553.17,1275.76 U1.G7@1565.97,1288.55 U1.E7@1617.15,1288.55 ; U1.J8@1514.79,1262.96 1527.58,1275.76 ; v1(1527.58,1122.21) U1.H13@1540.38,1135.01 U1.G12@1565.97,1160.6 ; v1(1527.58,1147.8) U1.H12@1540.38,1160.6 1553.17,1173.39 U1.G11@1565.97,1186.19 ; U1.H21@1540.38,930.29 U1.H19@1540.38,981.47 v1(1527.58,994.26) ; U1.H15@1540.38,1083.83 1545.25,1088.7 ; U1.H14@1540.38,1109.42 1547.13,1116.17 ; U1.H11@1540.38,1186.19 1545.91,1191.72 ; U1.H10@1540.38,1211.78 1547.54,1218.94 ; U1.H9@1540.38,1237.37 1553.17,1250.17 ; U1.H7@1540.38,1288.55 1527.58,1275.76 ; U1.H5@1540.38,1339.73 v1(1553.17,1352.53) U1.H4@1540.38,1365.33 ; U1.H2@1540.38,1416.51 v1(1553.17,1429.3) ; U1.G18@1565.97,1007.06 U1.H17@1540.38,1032.65 ; U1.G17@1565.97,1032.65 U1.H16@1540.38,1058.24 1546.56,1064.41 ; U1.G15@1565.97,1083.83 1553.17,1071.03 1546.56,1064.41 ; U1.G14@1565.97,1109.42 1553.17,1096.62 1545.25,1088.7 ; U1.G13@1565.97,1135.01 1553.17,1122.21 1547.13,1116.17 ; U1.G10@1565.97,1211.78 1553.17,1198.99 1545.91,1191.72 ; U1.G9@1565.97,1237.37 1553.17,1224.58 1547.54,1218.94 ; U1.G8@1565.97,1262.96 1553.17,1250.17 ; U1.F21@1591.56,930.29 U1.G21@1565.97,930.29 U1.G19@1565.97,981.47 1553.17,994.26 1547.83,999.61 ; U1.F5@1591.56,1339.73 U1.E5@1617.15,1339.73 v1(1629.94,1352.53) ; U1.F4@1591.56,1365.33 U1.E4@1617.15,1365.33 v1(1629.94,1378.12) U1.E3@1617.15,1390.92 ; U1.E18@1617.15,1007.06 v1(1604.36,994.26) U1.E19@1617.15,981.47 U1.D19@1642.74,981.47 U1.D20@1642.74,955.88 ; U1.E11@1617.15,1186.19 v1(1629.94,1198.99) ; U1.E10@1617.15,1211.78 v1(1629.94,1198.99) ; v1(1629.94,891.9) U1.D23@1642.74,879.1 ; U1.D14@1642.74,1109.42 U1.E13@1617.15,1135.01 v1(1629.94,1147.8) U1.D12@1642.74,1160.6 ; U1.D11@1642.74,1186.19 1655.54,1198.99 U1.C10@1668.34,1211.78 ; U1.D10@1642.74,1211.78 v1(1629.94,1198.99) ; U1.D8@1642.74,1262.96 v1(1655.54,1275.76) ; U1.D4@1642.74,1365.33 v1(1655.54,1352.53) ; U1.D3@1642.74,1390.92 v1(1655.54,1378.12) ; U1.C23@1668.34,879.1 v1(1681.13,891.9) U1.C22@1668.34,904.69 ; U1.C21@1668.34,930.29 v1(1681.13,917.49) ; U1.C12@1668.34,1160.6 U1.C11@1668.34,1186.19 v1(1681.13,1198.99) ; U1.C9@1668.34,1237.37 U1.B9@1693.93,1237.37 v1(1706.72,1250.17) ; U1.C5@1668.34,1339.73 v1(1681.13,1352.53) ; U1.A25@1719.52,827.92 1804.66,827.92 v1(1806.52,832.44) ; U1.A16@1719.52,1058.24 1771.69,1058.24 v1(1814.06,1015.87) ; U1.A15@1719.52,1083.83 v1(1738.12,1093) ; U1.A9@1719.52,1237.37 1732.07,1249.93 v1(1732.31,1250.17) 1777.86,1250.17 1815.83,1288.14 1861.08,1288.14 1876.01,1303.07 ; U1.A1@1719.52,1442.1 v1(1732.31,1429.3) ; v1(1812.96,1378.43) 1838.86,1404.33 R96.2@1839.75,1404.33 1839.56,1473.87 1861.06,1495.37 1896.23,1495.37 1909.34,1482.27 1909.34,1336.67 1902.36,1330.17 1876.01,1303.07 ; C74.2@1873.56,1313.61 1876.01,1303.07 ; v2(2155.44,2209.19) FPC1.12@2155.51,2165.35 ; v2(2193.08,2209.28) 2193.08,2165.09 FPC1.10@2194.88,2165.35 ; FPC1.8@2234.25,2165.35 v2(2234.29,2210.31) ; 1214.8,1281.45 v1(1220.5,1275.76) 1220.5,1301.35 ; 1214.8,1281.45 1214.9,1281.55 1214.9,1306.95 ; 1214.9,1306.95 1214.9,1332.54 ; 1214.9,1306.95 1220.5,1301.35 ; 1214.9,1332.54 1220.5,1326.94 1220.5,1301.35 ; 1271.68,1045.44 U1.V17@1284.48,1032.65 ; U1.V17@1284.48,1032.65 1297.27,1019.85 ; U1.J18@1514.79,1007.06 v1(1527.58,994.26) ; U1.J18@1514.79,1007.06 v1(1527.58,1019.85) ; v1(1527.58,1019.85) U1.J17@1514.79,1032.65 v1(1527.58,1045.44) ; v1(1527.58,1019.85) U1.H18@1540.38,1007.06 ; v1(1527.58,1019.85) U1.H17@1540.38,1032.65 ; v1(1527.58,1045.44) U1.H17@1540.38,1032.65 ; v1(1527.58,1045.44) 1546.56,1064.41 ; U1.H18@1540.38,1007.06 1547.83,999.61 ; U1.H18@1540.38,1007.06 1547.83,999.61
  Top w12: v1(1119.37,893.61) v1@1119.53,893.44 ; U1.AD22@1130.86,904.77 U1.AD22@1130.93,904.69
  Top w15: KEY3.3@-53.15,557.09 KEY4.4@-53.15,418.9 -63.03,409.01 -63.03,159.06 KEY4.3@-53.15,159.06 -28.57,134.48 v2(-28.57,106.95) ; KEY3.4@-53.15,816.93 KEY3.4@-44.24,816.93 ; KEY2.3@-53.15,971.26 -52.76,971.65 v2(-5.98,971.65) ; KEY2.4@-53.15,1231.1 -53.08,1231.17 v2(-5.98,1231.17) -0.07,1231.17 KEY2.2@39.37,1191.73 ; KEY1.3@-53.15,1385.43 v2(-5.98,1385.45) ; KEY1.4@-53.15,1645.27 -53,1645.42 v2(-5.98,1645.42) -0.15,1645.42 KEY1.2@39.37,1605.9 ; KEY5.3@-53.15,1799.61 -32.01,1799.61 v2(-31.44,1744.76) ; KEY5.4@-53.15,2059.45 v2(-5.98,2059.45) ; KEY3.4@-36.41,816.93 KEY3.4@-44.24,816.93 ; v1(-27.57,370.92) -20.9,379.53 KEY4.2@27.06,379.53 ; KEY4.2@16.16,368.63 KEY4.2@27.06,379.53 ; KEY4.2@39.37,379.53 KEY4.2@27.06,379.53 ; KEY3.2@39.37,777.56 -4.89,777.56 v2(-6.27,776.18) -6.27,778.96 KEY3.4@-44.24,816.93 ; v1(110.25,49.34) 110.25,32.35 124.52,18.09 U2.1@124.52,13.57 ; C108.1@139.46,588.09 v1(139.46,612.02) ; C109.1@215.18,554.09 C109.1@217.65,554.09 ; R62.1@217.65,472.99 C107.1@217.65,510.89 C109.1@217.65,554.09 ; v1(253.66,-37.61) 275.11,-37.61 C43.1@276.5,-39 ; C110.1@257.39,554.09 v1(246.86,554.09) C109.1@217.65,554.09 ; R114.2@354.33,-38.94 v1(373.29,-38.94) ; Q5.2@382.34,61.15 v1(382.34,102.88) ; v1@415.96,340.69 v1(416.26,340.39) ; C133.1@640.74,21.63 v2(640.74,52.24) ; C136.1@640.87,85.64 v2(668.88,85.64) ; v2(759.55,1713.66) 808.94,1713.66 J3.3@830.48,1735.2 841.03,1745.75 869.05,1745.75 v1(869.05,1807.26) ; v1(778.63,379.16) 795.68,362.11 R94.2@795.68,346.78 ; J3.4@830.48,1985.2 835.93,1990.65 854.55,1990.66 v2(906.5,1990.64) ; J5.1@976.38,-76.77 v2(1019.43,-76.77) ; C139.1@1114.88,-11.06 v2(1138.77,-11.05) ; U15.2@1118.28,38.42 v2(1118.28,71.94) ; v2(1140.69,187.84) C134.1@1140.69,217.46 ; C138.1@1140.88,-61.56 v2(1171.01,-61.56) ; R5.2@1158.53,562.42 v1(1177.89,581.78) 1187.52,591.41 Y1.4@1203.98,591.41 ; v2(1180.99,68.37) R98.2@1204.96,68.37 R99.2@1204.96,110.46 ; C35.2@1203.98,640.84 Y1.4@1203.98,591.41 ; Y1.4@1213.18,591.41 Y1.4@1203.98,591.41 ; v2(1269.84,509.96) 1288.3,528.42 Y1.2@1297.24,528.42 ; v1(1272.77,659.32) 1278.13,653.96 C36.2@1278.13,641.49 ; C89.1@1289.81,1844.71 v1@1326.88,1844.71 ; Y1.2@1299.79,528.42 Y1.2@1297.24,528.42 ; C94.1@1312.11,1900.27 v1(1334.24,1900.27) ; C67.2@1312.28,1942.99 v1(1326.7,1928.57) ; v1(1328.72,1844.71) v1@1326.88,1844.71 ; C96.1@1341.74,1820.88 1341.74,1829.84 v1@1326.88,1844.71 ; v1(1349.59,1942.46) C46.1@1349.59,1964.62 ; v1(1386.16,1942.46) C66.1@1386.16,1964.62 ; C50.1@1391.77,1820.88 1404.57,1833.67 v1(1420.23,1833.67) 1421.35,1833.67 1444.95,1833.67 C48.1@1450.08,1828.54 ; J2.5@1404.41,529.36 1298.17,529.36 Y1.2@1297.24,528.42 ; C39.2@1413.89,697.09 v2(1445.06,697.09) ; v1(1423.6,1942.46) 1423.6,1964.49 C47.1@1423.73,1964.62 C91.1@1461.12,1964.62 ; v1(1426.82,1884.65) C95.1@1450.08,1884.65 ; v1(1430.8,1917.84) 1441.76,1917.84 C53.1@1450.08,1926.16 ; C82.1@1514.85,2049.56 1530.95,2033.46 v1(1547.49,2033.46) C80.1@1585.21,2033.46 ; v1(1555.16,1962.33) 1555.16,1940.41 1555.3,1940.41 C79.1@1559.21,1936.49 ; v3(1734.2,562.71) 1750.86,550.6 J2.6@1750.86,529.36 ; FPC1.28@1778.81,2291.68 1793.31,2277.18 FPC1.28@1793.31,2266.73 ; v3(1788.87,-41.17) 1839.2,-41.17 J8.9@1839.37,-41.34 ; v3(1788.87,120.08) J8.6@1839.37,120.08 ; J8.5@2090.66,120.08 J8.5@2090.66,120.9 ; v3(2111.55,120.9) J8.5@2090.66,120.9 ; v3(2111.87,158.3) 2090.66,137.09 J8.5@2090.66,120.9 ; v3(2163.14,145.76) 2191.64,145.76 J8.7@2217.32,120.08 ; J8.8@2217.32,-41.34 v3(2268.5,-41.34) ; v2(2281.43,1785.43) C118.1@2303.87,1785.43 ; C116.1@2341.57,1708.13 2350.88,1698.82 CN1.6@2433.07,1698.82 2474.6,1698.82 2490.14,1714.36 v3(2490.14,1745.02) ; v3(2404.52,2266.73) FPC1.27@2458.66,2266.73 ; v2(2410.3,1505.91) CN1.10@2452.76,1505.91 ; v2(2415.34,2119.72) 2441.43,2119.72 2452.76,2108.4 CN1.13@2452.76,2098.43 v2(2490.58,2098.42) ; D9.1@2555.18,47.94 D9.1@2560.77,47.94 ; R144.2@2633.37,2342.58 v1(2655.63,2342.58) ; v2(2830.71,1490.31) CN1.11@2830.71,1527.56 ; v2(2830.71,2088.98) CN1.12@2830.71,2129.92
  Top w20: U14.2@456.74,257.9 501.48,257.9 ; v3(499.02,316.58) 501.48,316.58 501.48,257.9 ; v3(508.92,178.1) 508.92,250.47 501.48,257.9 ; C90.1@1390.61,2105.41 1398.31,2113.11 1398.31,2131.41 ; v3(1398.31,2150.82) 1398.31,2131.41 ; C81.1@1440.48,2131.41 1398.31,2131.41 ; v3(2593.99,47.94) 2560.77,47.94 2560.77,48.48 v3(2593.99,81.69)
  L4 SIG w7: v1(121.87,1713.99) 121.87,741.08 v1(237.61,627.06) 329.04,535.63 1036.64,535.63 1284.78,783.77 1372.34,783.77 v1(1399.68,811.1) ; 216.23,1821.42 v1(335.15,1821.42)
  L4 SIG w8: 216.23,1821.42 115.09,1720.28 115.09,357.72 168.09,304.72 499.02,304.72 528.16,304.72 697.84,474.4 v1(782.15,474.4) 1416.27,474.4 v1(1525.43,583.57) 1544.11,602.24 1544.11,780.45 1556.83,793.18 1595.56,793.18 1609.95,778.79 v1(1609.95,764.98) 1609.95,614.8 1425.88,430.73 703.39,430.73 544.35,271.69 150.9,271.69 77.61,344.98 77.61,2144.2 152.34,2218.93 434.4,2218.93 482.76,2170.57 ; v1(316.29,238.58) 321.59,238.58 327.87,244.87 ; v1(473.04,2170.57) 482.76,2170.57 ; v1(778.63,379.16) 762.62,363.15 675.41,363.15 557.12,244.87 327.87,244.87 ; 327.87,244.87 138.12,244.87 49.61,333.38 49.61,2165.72 136.95,2253.06 451.71,2253.06 v1(619.03,2085.74) 647.54,2057.23 1088.48,2057.23 1138.92,2006.79 1138.92,1988.02 1125.09,1974.18 1104.46,1974.18 1059.99,2018.65 634.68,2018.65 482.76,2170.57
  Bottom w4.2: v1@481.74,633.84 v1(482.59,633.84) ; C171.2@945.81,2355.1 C171.2@953.48,2355.1
  Bottom w4.4: v2@1574.7,2355.05 v2(1576.39,2356.74)
  Bottom w7: C111.1@312.5,1818.21 331.94,1818.21 v1(335.15,1821.42) ; v1(593.38,1421.76) 601.05,1429.43 635.38,1429.43 653.28,1411.53 653.28,1410.18 R115.1@654.07,1409.38
  Bottom w10: v1(481.57,580.49) 481.57,608.53 C273.1@481.74,608.7 ; v1(504.55,928.61) 504.55,948.97 C146.1@510.87,955.29 ; v1(531.72,580.49) 531.72,604.46 R59.1@537.92,610.66 ; C272.1@582.99,607.15 582.99,581.23 v1(583.72,580.49) ; v1(688.34,580.49) 688.34,607.06 C271.1@688.44,607.15 ; C171.2@953.48,2355.1 963.92,2355.1 v2(964.14,2355.31) ; C12.1@1094.14,866.68 1099.85,866.68 1119.37,886.2 v1(1119.37,893.61) ; C42.2@1181.85,786.61 v1(1212.96,787.39) ; v1(1194.91,943.08) 1195.31,942.68 C199.1@1211.07,942.06 ; v1(1194.91,968.67) 1206.87,968.67 1213.54,975.34 C57.1@1216.54,975.34 ; v1(1194.91,1071.03) 1217.13,1048.8 C196.1@1221.13,1048.8 ; v1(1194.91,1147.8) 1197.53,1150.43 C197.1@1221.13,1150.43 ; v1(1220.5,1275.76) 1235.69,1290.95 C5.1@1236.98,1290.95 ; C56.1@1248.46,872.98 1255.13,866.31 v1(1271.68,866.31) ; C25.1@1249.33,1183.53 1249.46,1183.41 1256.1,1183.41 v1(1271.68,1198.99) ; C28.1@1249.33,1218.53 1255.38,1224.58 v1(1271.68,1224.58) ; C23.1@1270.98,1250.38 1279.73,1250.17 v1(1297.27,1250.17) ; C26.1@1297.82,879.91 1310.87,879.91 v1(1322.86,891.9) ; C29.1@1313.51,1020.05 1313.51,1036.09 v1(1322.86,1045.44) ; v1(1322.86,866.31) 1327.12,862.04 C73.1@1347.32,862.04 ; C3.1@1450.45,810.68 v1(1471.39,810.7) ; C19.1@1450.75,972.61 v1(1450.81,994.26) v1(1450.81,994.26) ; v1(1450.81,1352.53) 1460.11,1343.23 C20.1@1460.11,1328.93 ; v1(1476.4,866.31) 1495.84,846.87 C7.1@1502.81,846.87 ; v1(1501.99,1019.85) 1501.99,1001.21 C32.1@1507.4,995.8 ; v1(1553.17,1352.53) v1@1553.33,1352.69 ; C175.2@1557.87,2354.57 1574.23,2354.57 v2@1574.7,2355.05 ; C9.1@1607.08,1200.56 v1(1629.94,1198.99) ; C4.1@1622.19,869.6 v1(1629.94,891.9) ; C31.1@1684.15,1250.11 1706.66,1250.11 v1(1706.72,1250.17) ; v2(1758.74,2316.77) 1778.12,2316.77 C185.1@1778.81,2317.46 ; C204.1@1938.98,1600.43 1955.76,1599.61 v2(1976.43,1620.29) 1996.89,1640.74 J13.4@2027.56,1640.74 ; v1(1992.67,1589.28) 2000.27,1581.69 J13.7@2027.56,1581.69 ; J13.39@2027.56,951.77 v1(2063.23,951.25) ; J13.32@2027.56,1089.56 J13.31@2027.56,1109.25 2066.02,1109.25 v1(2066.07,1109.3) ; J13.30@2027.56,1128.93 J13.29@2027.56,1148.62 2065.98,1148.62 v1(2066.07,1148.71) ; J13.28@2027.56,1168.3 J13.27@2027.56,1187.99 2065.92,1187.99 v1(2066.07,1188.14) ; J13.26@2027.56,1207.67 J13.25@2027.56,1227.36 2065.5,1227.36 v1(2066.07,1227.93) ; J13.24@2027.56,1247.04 J13.23@2027.56,1266.73 J13.23@2034.09,1266.73 ; J13.22@2027.56,1286.41 J13.21@2027.56,1306.1 2065.91,1306.1 v1(2066.07,1306.26) ; J13.20@2027.56,1325.78 J13.19@2027.56,1345.47 2065.92,1345.47 v1(2066.07,1345.31) ; J13.18@2027.56,1365.15 J13.17@2027.56,1384.84 2066.01,1384.84 v1(2066.07,1384.91) ; J13.16@2027.56,1404.52 J13.15@2027.56,1424.21 v1(2066.07,1424.23) ; J13.14@2027.56,1443.89 J13.13@2027.56,1463.58 2065.89,1463.58 v1(2066.07,1463.76) ; J13.10@2027.56,1522.63 v1(2066.07,1522.63) ; J13.23@2034.12,1266.75 v1(2066.07,1266.75) ; v2(2783.92,2265.54) 2791.5,2265.54 U11.4@2803.6,2253.44 ; U11.8@2862.66,2233.75 U11.9@2862.66,2214.07 v2(2881.17,2214.07)
  Bottom w12: J13.37@2027.56,991.14 C205.1@1940.87,991.14 ; J13.36@2027.56,1010.82 v1(2070.43,1010.82) ; J13.35@2027.56,1030.51 v1(1966.67,1030.51) 1947.93,1011.77 C205.1@1940.87,991.14 ; J13.33@2027.56,1069.88 v1(2065.79,1069.57) ; C205.1@1940.87,991.14 1938.87,991.14 C205.1@1938.79,985.05 C205.1@1940.87,991.14
  Bottom w15: R102.2@-46.84,371.3 v1(-27.57,370.92) C130.1@-10.08,371.3 ; C137.1@-16.93,685.71 v1(-1.49,701.16) ; v2(-6.27,776.18) v2(-6.27,776.18) -6.19,789.37 C132.1@9.07,804.64 ; v2(180.15,403.92) 180.15,451.99 U35.4@197.26,451.99 ; C44.1@227.89,-37.61 v1(253.66,-37.61) ; C114.1@312.59,2328.14 v2(312.58,2357.85) ; U9.7@338.3,2184.44 v1(338.48,2143.75) ; C142.1@345.7,1598.93 345.7,1586.3 v1(362.81,1569.18) 368.1,1563.89 C58.1@368.1,1546.74 ; R93.2@354.33,-38.94 v1(373.29,-38.94) C124.1@400.53,-38.94 ; Q3.2@359.16,60.93 382.34,84.11 v1(382.34,102.88) ; v2(361.2,1878.52) R63.2@361.2,1901.83 ; C276.1@372.3,956.87 378.56,950.61 v1(378.56,924.88) ; C180.1@416.52,1598.93 416.52,1578.47 v1(425.81,1569.18) ; C274.1@419.44,607.03 419.44,633.68 v1(425.81,640.05) ; C282.1@481.74,653.22 481.74,633.84 481.74,608.7 C273.1@490.89,607.03 ; R288.1@485.11,1511.04 489.96,1506.19 v1(520.29,1506.19) ; C125.1@496.88,1556.87 507.98,1556.87 v1(520.29,1569.18) ; C123.1@505.25,1292.65 512.18,1285.72 v1(520.29,1285.72) ; R92.1@531.08,1409.05 531.08,1422.35 v1(536.26,1427.53) ; v2(593.17,2354.57) C159.2@615.94,2354.57 ; v1(614.78,703.04) 614.78,681.31 R55.1@617.05,679.05 ; C278.1@630.23,916.68 630.23,916.81 636.31,922.89 v1(646.91,922.89) 638.33,922.89 C14.1@638.33,952.96 ; v2(637.36,2342.89) 664.63,2342.89 C158.2@664.63,2334.59 ; R58.1@642.46,766.02 664.2,766.02 ; C178.1@651.33,1598.93 659.57,1590.69 v1@659.57,1571.58 ; C153.1@659.57,1549.32 v1@659.57,1571.58 ; v1(662.09,1571.1) v1@659.57,1571.58 ; v1(662.74,779.37) 662.74,767.48 664.2,766.02 ; v1(677.77,640.05) 688.44,629.39 C271.1@688.44,607.15 ; C144.1@682.2,766.02 664.2,766.02 ; v1(709.27,640.05) 725.7,623.62 C15.1@725.7,607.15 ; C141.1@722.4,1598.93 722.4,1587.55 v1(740.77,1569.18) ; v2(729.43,1922.05) 729.43,1945.02 C156.2@729.52,1950.36 ; v1(740.77,1348.71) 740.77,1336.58 744.72,1332.62 C17.1@744.72,1328.07 ; U18.2@760.7,2288.29 v2(760.7,2344.28) ; v2(779.59,1914.67) C157.2@779.59,1945.13 ; v1(782.15,474.4) C181.1@806.46,474.4 ; v1(803.76,1569.18) 826.05,1591.47 C13.1@826.05,1598.93 826.05,1618.31 C284.1@852.05,1644.31 ; C181.1@806.4,466.03 806.46,466.09 C181.1@806.46,474.4 ; R165.2@806.46,503.54 C181.1@806.46,474.4 ; C150.1@815.84,948.97 835.25,948.97 ; C16.1@829.2,607.15 829.57,607.15 835.25,612.83 v1(835.25,640.05) ; v1(835.25,860.52) 835.25,884.34 C275.1@836.23,885.32 ; v1(835.25,923.52) 835.25,948.97 ; C129.2@838.18,1807.26 v1(869.05,1807.26) ; C11.1@838.18,1945.89 838.18,1932.45 v2(858.93,1911.7) ; C183.1@846.97,2283.46 846.97,2258.19 v1(859.95,2245.21) ; C148.1@850.35,948.97 835.25,948.97 ; v1(866.67,381.58) R143.2@889.6,381.58 ; C126.1@889.94,1297.18 889.94,1298.08 893.36,1301.5 v1(893.36,1317.21) ; v2(906.5,1990.64) C60.2@933.16,1990.65 ; C167.2@944.06,2142.6 944.06,2155.66 ; v2(944.06,2187.25) 944.06,2155.66 ; C171.2@944.06,2354.57 C171.2@945.81,2355.1 ; C168.2@992.35,2155.66 944.06,2155.66 ; v2(992.35,2306.71) C170.2@992.35,2334.59 ; R185.1@1020.87,1745.44 1024.47,1741.84 C147.1@1024.47,1704.63 ; 1053.26,245.79 C202.1@1080.89,218.16 ; C45.1@1058.36,1818.66 v1(1075.95,1818.66) ; v2@1070.75,2323.54 1074.29,2323.54 1151.42,2323.54 C186.1@1151.42,2317.46 ; U20.2@1074.29,2288.29 v2(1074.29,2316.87) ; v1(1177.89,581.78) 1184.59,588.48 C201.1@1184.59,618.01 ; R12.1@1181.78,715.65 R12.1@1181.85,715.65 ; v1(1217.43,1630.89) C149.1@1217.43,1648.01 1257.87,1648.01 C151.1@1267.42,1638.47 ; C196.1@1221.13,1048.8 1223.14,1048.8 1247.22,1024.72 C27.1@1247.22,1010.17 ; v1(1235.22,1787.89) C54.1@1235.22,1819 ; C165.2@1238.95,2354.57 1238.95,2316.32 v2(1239.33,2316.32) ; v3(1242.2,2186.08) 1240.49,2175.4 1238.95,2175.4 C162.2@1238.95,2142.6 1275.68,2142.6 C195.2@1288.74,2155.66 ; R174.2@1257.63,674.46 v1(1272.77,659.32) ; J9.1@1281.5,-26.38 v2(1281.5,22.87) ; v2(1288.74,2303.94) C164.2@1288.74,2334.59 ; C30.1@1295.16,1426.33 1297.27,1424.23 v1(1297.27,1378.12) ; v3(1300.97,2205.05) 1338.46,2177.88 1338.46,2156.44 C163.2@1342.52,2155.66 ; v1(1326.7,1928.57) 1335.71,1928.57 v1(1349.59,1942.46) 1381,1911.05 U23.41@1381,1892.37 ; v1(1328.72,1844.71) 1334.24,1850.23 1334.24,1890.25 v1(1334.24,1900.27) ; U19.2@1381.35,2288.29 v2(1381.37,2316.18) ; v2(1384.76,2420.5) 1384.76,2429.86 C194.2@1404.34,2449.45 ; v1(1386.16,1942.46) v1(1423.6,1942.46) ; v1@1417.34,1836.57 v1(1420.23,1833.67) ; 1417.62,1904.66 1424.06,1911.1 ; v1(1426.82,1884.65) 1426.82,1908.34 1424.06,1911.1 ; v1(1430.8,1917.84) 1424.06,1911.1 ; v2(1441.71,2317.46) C184.1@1461.88,2317.46 ; C20.1@1459.3,1328.13 C20.1@1460.11,1328.93 ; R145.2@1499.96,2471.5 1505.45,2471.5 v1(1523.97,2452.97) ; v1(1502.01,687.48) 1502.11,697.21 R173.2@1507.86,706.32 ; R191.2@1507.42,473.33 v2(1530.11,473.33) ; R177.2@1507.97,583.57 v1(1525.43,583.57) ; v1(1527.58,866.31) 1542.13,866.31 C33.1@1552.55,876.73 ; R196.1@1540.87,1781.81 R121.1@1577.63,1781.81 v1(1599.32,1781.81) ; v1(1555.16,1962.33) 1575.24,1962.33 R195.2@1577.63,1964.72 1585.79,1964.72 1611.62,1990.55 1627.39,1990.55 ; v1(1579.74,2177.69) C172.2@1579.74,2142.6 1617.15,2142.6 1626.4,2151.86 C173.2@1626.4,2155.66 v2(1626.4,2186.11) ; v2(1604.98,2305.7) C174.2@1604.98,2334.59 ; C2.1@1624.25,1403.56 1624.25,1384.75 1629.94,1379.05 v1(1629.94,1378.12) ; Y3.4@1627.39,1954.03 1627.39,1990.55 ; v1(1655.54,1275.76) 1664.18,1284.41 1664.18,1301.35 C8.1@1664.12,1301.42 ; C49.2@1661.39,1815.81 1690.38,1815.81 ; U12.4@1678.14,431.62 v2(1678.86,379.54) ; Y3.2@1690.38,1867.42 v1(1690.38,1836.3) 1690.38,1815.81 ; U21.2@1698.09,2288.29 v2(1698.06,2316.75) ; v2(1698.06,2316.75) v2(1698.06,2360.51) ; v1(1738.66,1898.6) C51.2@1738.66,1920.52 1769.14,1920.52 ; R2.2@1740.65,1166.29 1766.63,1166.29 v1(1767.69,1167.65) ; C93.1@1759.88,211.91 1789.32,211.91 v3(1789.49,212.08) ; R150.2@1817.4,2443.42 v3(1839.96,2443.42) ; v3(1891.38,128.29) 1933.37,128.29 U6.1@1933.56,128.48 ; v3(1891.38,165.88) U6.2@1933.56,165.88 ; C62.1@1910.68,2313.21 v2(1932.31,2314.43) ; C63.1@1962.75,2287.53 v2(1962.75,2309.45) ; v2(1991.92,2291.31) U4.2@2020.65,2291.31 ; C64.1@2033.52,2163.01 2036.5,2166 v2(2036.5,2215.54) 2055.03,2215.54 C65.1@2060.01,2210.56 ; U6.6@2035.92,128.48 2103.97,128.48 v3(2111.55,120.9) ; U6.5@2035.92,165.88 2104.28,165.88 v3(2111.87,158.3) ; v3(2053.41,845.47) J13.42@2122.05,845.47 ; C76.1@2104.26,600.61 v2(2104.78,625.77) ; J13.41@2122.05,1786.41 v2(2185.33,1786.41) ; C88.1@2130.43,552.14 v2(2160.53,552.14) ; v2(2175.67,2234.63) C152.1@2175.67,2255.22 ; C176.1@2191.11,263.39 2190.94,301.22 v3(2190.85,301.32) R156.1@2231.22,301.32 ; R166.2@2251.23,566 2251.37,566.14 C182.1@2251.37,605.37 v2(2251.37,632.32) ; U22.2@2255.55,97.14 U22.2@2255.55,101.63 ; v1(2268.03,66.47) 2255.55,78.95 U22.2@2255.55,101.63 ; v1(2268.22,131.44) 2255.55,118.77 U22.2@2255.55,101.63 ; v2(2294.62,2362) 2317.55,2338.85 U16.1@2317.55,2326.72 ; C117.2@2297.14,2446.32 v2(2297.14,2468.59) ; C115.2@2338.87,2159.49 2370.81,2127.55 2407.51,2127.55 v2(2415.34,2119.72) ; R154.1@2372.64,205.81 v1(2372.68,227.07) ; v2(2380.5,1849.6) 2392.71,1837.39 C119.1@2392.71,1819.43 ; U10.4@2470.19,2348.99 v2(2470.19,2369.84) ; C177.1@2555.13,72.56 v3(2555.13,103.55) ; C145.1@2566.59,2227.49 v2(2566.59,2250.14) ; R45.1@2622.64,1747.02 C97.2@2659.8,1747.02 v2(2659.8,1772.87) ; C101.2@2659.8,1652.47 v2(2659.8,1676.61) ; C99.2@2659.8,1891.5 v2(2659.8,1913.57) ; C120.2@2706.19,2193.49 v2(2725.4,2193.49) ; R52.2@2709.83,1652.47 R52.2@2709.83,1652.47 v2(2709.87,1676.61) ; C100.1@2709.83,1773.02 2711.42,1773.02 2711.58,1772.87 v2(2734.33,1772.87) ; C98.1@2709.83,1917.5 v2(2709.83,1949.62) ; R54.1@2786.26,1610.92 v2(2786.26,1639.24) ; v1(2788.1,2178.62) 2804.31,2194.83 U11.1@2803.6,2194.38 ; v2(2848.49,1677.33) v2(2848.49,1713.02) v2(2848.49,1751.45) ; 1627.39,1990.55 v1(1662.36,1990.55) 1748.5,1990.55 v1(1769.14,1969.91) 1769.14,1920.52 ; 1690.38,1815.81 1744.64,1815.81 1769.14,1840.31 v1(1769.14,1889.05) 1769.14,1920.52
  Bottom w20: v1(466.92,1647.19) R47.1@495.63,1647.19 ; C143.1@613.12,1598.93 C178.1@651.33,1598.93 651.33,1646.03 C200.1@652.5,1647.19 ; v1(753.34,2416.75) 764.11,2427.51 R133.2@764.11,2443.42 ; C284.1@852.05,1644.31 923.5,1644.31 v1(1080.5,1487.31) ; v2(858.93,1911.7) U25.2@896.15,1911.7 ; R148.2@1077.69,2443.42 v1(1077.78,2419.75) ; U17.2@1105.53,1728.94 v2(1144.35,1728.94) ; C69.2@1109.73,1830.57 1109.73,1824.43 v1(1128.51,1805.65) 1144.35,1789.82 v2(1144.35,1769.73) v2(1144.35,1728.94) ; R12.1@1181.85,715.65 C41.2@1181.85,751.1 C42.2@1181.85,786.61 ; C68.1@1940.66,729.51 C68.1@1947.83,742.51 ; C70.1@1947.83,780.09 C68.1@1947.83,742.51 ; U7.2@1964.89,562.55 v1(1964.89,587.16) v1(1964.89,643.59) v1(1964.89,684.96) 1947.83,702.02 C68.1@1947.83,742.51 ; C71.1@2317.16,2007.58 v1(2343.31,2007.58) 2371.37,2007.58 C72.1@2371.76,2007.97 ; v2(2848.49,1713.02) U8.2@2896.43,1713.02
  other v1: 1607.51,-73.4 1692.07,-73.4 1270,-71.35 1024.65,-21.31 1027.88,39.22 1854.12,42.86 1787.89,45.68 1591.31,61.18 1686.43,96.41 1250.63,149.79 1253.05,231.3 1679.8,484.85 1602.23,504.44 1682.57,528.43 1829.24,529.66 1602.23,543.64 1781.26,552.51 1829.46,576.7 1699.81,600.54 1829.9,613.31 362.81,640.05 1682.23,640.69 1731.74,641.7 2155.13,659.64 2059.78,660.79 144.42,714.95 2249.33,721.67 119.6,779.35 195.11,810.94 195.37,872.38 120.41,875.34 195.67,927.5 2158.22,945.83 120.16,953.26 196.2,978.07 2156.84,1032.37 119.68,1041.24 196.2,1044.08 121.02,1103.49 195.72,1103.39 2155.47,1116.17 195.4,1163.84 120.97,1164.55 2156.84,1209.59 195.24,1227.45 120.21,1241.78 249.12,1248.6 195.42,1287.86 2158.22,1315.37 120.16,1335.14 194.96,1375.74 2157.4,1426.45 115.29,1459.08 1890.6,1502.83 2158.2,1526.17 1928.02,1546.13 244.86,1571.6 116.8,1576.55 2158.2,1627.49 323.67,1642.11 1112.75,1647.8 1473.08,1694.3 220.79,1700.49 341.95,1707.43 475.98,1708.73 617.45,1709.07 1375.85,1711.04 1217.75,1729.12 1674.52,1748.82 1497.17,1750.99 1590.19,1750.99 124.51,1759.57 372.47,1792.36 957.32,1796.02 730.46,1798.5 481.65,1802.73 600.98,1802.73 126.2,1812.04 125.35,1869.59 958.78,1869.54 441.56,1889.59 504.5,1911.9 199.83,1913.6 600.98,1916.98 961.18,1931.98 124.51,1948.29 199.83,1964.37 476.22,2014.82 1798.74,2045.75 124.03,2055.3 475.52,2060.88 2921.13,2065.98 2694.59,2071.77 2757.51,2072.82 1857.28,2117.33 398.57,2127.34 -28.29,2129.51 2923.67,2135.67 220.14,2163.26 1857.49,2187.1 2926.2,2225.64 106.5,2234.12 609.26,2235.33 1858.77,2249.75 216.71,2252.64 2927.47,2319.41 442.82,2332.03 183.14,2344.1 92.64,2351.9 -65.35,2381.02 1924.66,2412.04 2037.7,2413.03 2242.16,2413.03 2158.61,2414.01 1705.82,2428.97 493.14,2432.55 569.73,2433.78 -63.66,2436.88 398.03,2436.25 35.1,2472.81
  other v3: 529.73,324.44
GPS_DET: C160.2 R198.1 R199.2 U1.W4 | length 5089.3
  Top w4.2: v1(1246.09,1378.12) U1.W4@1258.89,1365.33
  Top w5: R198.1@1728.71,304.02 C160.2@1728.65,342.56 C160.2@1728.65,342.56 1728.65,382.04 R199.2@1728.71,382.1 1745.57,382.1 v1(1750,382.1)
  L4 SIG w5: v1(20.72,1734.86) 26.11,1729.47 26.11,84.74 89.38,21.47 226.96,21.47 427.54,222.05 567.54,222.05 685.14,339.65 957.46,339.65 1022.16,404.35 1727.75,404.35 v1(1750,382.1)
  Bottom w5: v1(20.72,1734.86) 20.72,1733.49 861.88,1733.49 1191.81,1403.57 1191.81,1384.33 1217.7,1358.43 1226.4,1358.43 v1(1246.09,1378.12)
GPS_PWR: C93.2 J9.5 L3.1 | length 178.6
  Bottom w20: J9.5@1592.52,238.19 1669.96,238.19 C93.2@1699.08,209.06 ; L3.1@1699.88,152.34 1699.88,208.27 C93.2@1699.08,209.06 ; C93.2@1699.88,211.91 1699.59,210.89 C93.2@1699.08,209.06
GPS_RX: J9.2 R201.2 | length 109.4
  Bottom w5: J9.2@1592.52,-19.69 R201.2@1701.89,-19.69
GPS_RXD: R200.1 U1.D18 | length 1363
  Top w5: U1.D18@1642.74,1007.06 v1(1655.54,1019.85)
  Bottom w5: R200.1@1204.79,144.45 1204.79,317.76 1255.3,368.27 1607.62,368.27 1636.17,396.82 1636.17,784.44 1724.99,873.26 1724.99,982.71 1696.62,1011.07 1664.31,1011.07 v1(1655.54,1019.85)
GPS_TX: J9.3 R200.2 | length 87.4
  Bottom w15: R200.2@1204.79,110.45 1230.6,84.65 J9.3@1281.5,84.65
GPS_TXD: R201.1 U1.C19 | length 1112.2
  Top w5: v1(1601.77,385.43) 1634.06,353.13 1634.06,58.11 v1(1677.51,14.66) ; U1.C19@1668.34,981.47 v1(1681.13,994.26)
  Bottom w5: v1(1601.77,385.43) 1624.58,408.24 1624.58,788.21 1712.18,875.82 1712.18,963.21 v1(1681.13,994.26) ; v1(1677.51,14.66) 1690.22,13.92 1701.49,13.92 R201.1@1701.89,14.31
GS_WAKEUP: D11.1 U11.6 | length 126.8
  Top w5: D11.1@2739.06,2284.21 2739.15,2284.3 v1(2829.34,2284.3)
  Bottom w5: v1(2829.34,2284.3) 2842.97,2270.67 U11.6@2842.97,2253.44
IDAC_OUT: C74.1 R95.2 U1.C8 | length 243.6
  Top w5: U1.C8@1668.34,1262.96 1680.88,1275.51 1774.36,1275.51
  Top w8: 1774.36,1275.51 1812.46,1313.61 C74.1@1839.56,1313.61 1839.56,1364.76 R95.2@1839.75,1364.96
JTAG_TCK: TP25.1 U1.D16 | length 229.1
  Top w5: U1.D16@1642.74,1058.24 v1(1655.54,1071.03)
  Bottom w5: v1(1655.54,1071.03) 1663.4,1063.17 1698.01,1063.17 1698.07,1063.23 1758.26,1003.03 1792.45,1003.03 TP25.1@1824.92,970.56
JTAG_TDI: TP13.1 U1.C15 | length 166.8
  Top w5: U1.C15@1668.34,1083.83 v1(1681.13,1096.62)
  Bottom w5: v1(1681.13,1096.62) 1682.06,1095.69 1705.54,1095.69 1730.92,1070.31 TP13.1@1818.96,1070.31
JTAG_TDO: TP23.1 U1.C16 | length 205.2
  Top w5: U1.C16@1668.34,1058.24 1681.13,1071.03 1788.78,1071.03 v1(1824.25,1035.56)
  Bottom w5: v1(1824.25,1035.56) 1838.62,1021.19 TP23.1@1847.62,1021.19
JTAG_TMS: TP22.1 U1.D15 | length 162.2
  Top w5: U1.D15@1642.74,1083.83 v1(1655.54,1096.62)
  Bottom w5: v1(1655.54,1096.62) 1672.99,1079.17 1702.77,1079.17 1747.9,1034.04 TP22.1@1773.68,1034.04
JTAG_TRSTN: TP24.1 U1.C17 | length 138.9
  Top w5: U1.C17@1668.34,1032.65 v1(1681.13,1045.44)
  Bottom w5: v1(1681.13,1045.44) 1689.41,1037.16 1707.12,1037.16 1767.93,976.35 1767.93,974.87 TP24.1@1769.76,971.43
LCD_BL_EN: R49.1 U1.J3 | length 1333.4
  Top w5: v1(1511.7,1509.41) 1502.77,1500.49 1502.77,1402.94 U1.J3@1514.79,1390.92
  L4 SIG w5: v1(1511.7,1509.41) 1529.93,1509.41 1536.65,1509.41 1558.82,1531.58 1844.46,1531.58 1990.83,1677.95 v1(2622.64,1677.95)
  Bottom w5: R49.1@2622.64,1652.47 v1(2622.64,1677.95)